# EAGLE board project (EAGLE 9.7.0)
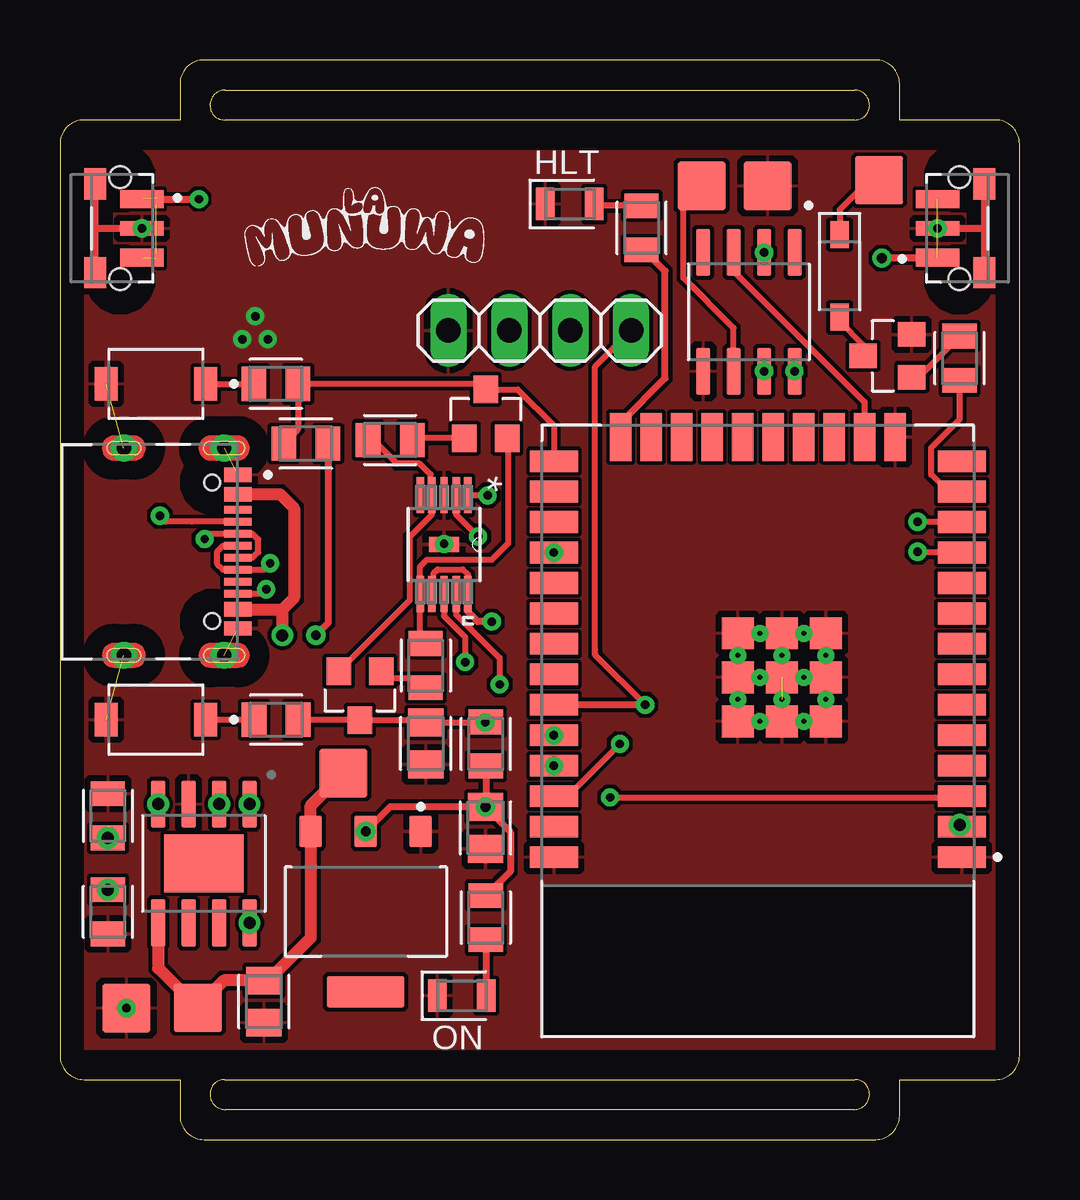
[diagram p0: board, top side]
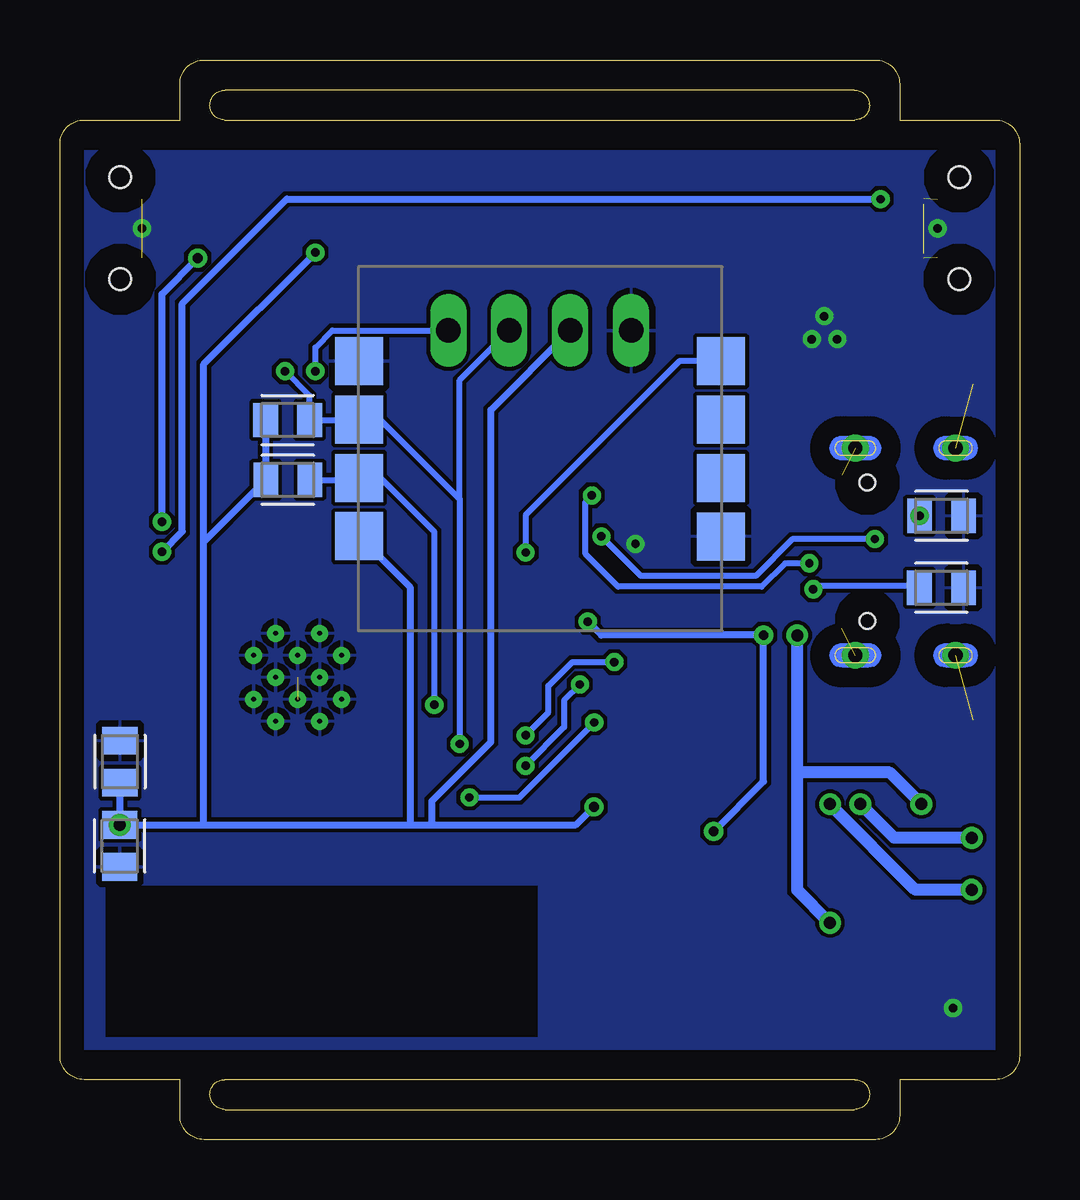
[diagram p1: board, bottom side, seen from below]

Size 40 x 45 mm. Coordinates in mm from the lower left corner, seen from the top.
Outline: 6.25,43.11 6.25,43.17 arc-85 6.88,43.75 33.12,43.75 arc-75 33.73,43.28 arc-105 33.13,42.5 6.87,42.5 arc-90 6.25,43.11
Outline: 5.99,28.82 6,28.85 6,28.87 6.01,28.9 6.01,28.93 6.02,28.95 6.04,28.97 6.05,28.99 6.07,29.02 6.08,29.03 6.1,29.05 6.12,29.07 6.14,29.08 6.17,29.09 6.19,29.1 6.22,29.11 6.24,29.12 6.27,29.12 6.29,29.12 7.39,29.12 7.42,29.12 7.45,29.12 7.47,29.11 7.5,29.1 7.52,29.09 7.54,29.08 7.57,29.07 7.59,29.05 7.61,29.03 7.62,29.02 7.64,28.99 7.65,28.97 7.67,28.95 7.68,28.93 7.69,28.9 7.69,28.87 7.69,28.85 7.7,28.82 7.69,28.8 7.69,28.77 7.69,28.75 7.68,28.72 7.67,28.7 7.65,28.67 7.64,28.65 7.62,28.63 7.61,28.61 7.59,28.59 7.57,28.58 7.54,28.56 7.52,28.55 7.5,28.54 7.47,28.53 7.45,28.53 7.42,28.52 7.39,28.52 6.29,28.52 6.27,28.52 6.24,28.53 6.22,28.53 6.19,28.54 6.17,28.55 6.14,28.56 6.12,28.58 6.1,28.59 6.08,28.61 6.07,28.63 6.05,28.65 6.04,28.67 6.02,28.7 6.01,28.72 6.01,28.75 6,28.77 6,28.8 5.99,28.82
Outline: 5.99,20.18 6,20.21 6,20.23 6.01,20.26 6.01,20.29 6.02,20.31 6.04,20.33 6.05,20.35 6.07,20.38 6.08,20.39 6.1,20.41 6.12,20.43 6.14,20.44 6.17,20.45 6.19,20.46 6.22,20.47 6.24,20.48 6.27,20.48 6.29,20.48 7.39,20.48 7.42,20.48 7.45,20.48 7.47,20.47 7.5,20.46 7.52,20.45 7.54,20.44 7.57,20.43 7.59,20.41 7.61,20.39 7.62,20.38 7.64,20.35 7.65,20.33 7.67,20.31 7.68,20.29 7.69,20.26 7.69,20.23 7.69,20.21 7.7,20.18 7.69,20.16 7.69,20.13 7.69,20.11 7.68,20.08 7.67,20.05 7.65,20.03 7.64,20.01 7.62,19.99 7.61,19.97 7.59,19.95 7.57,19.94 7.54,19.92 7.52,19.91 7.5,19.9 7.47,19.89 7.45,19.89 7.42,19.88 7.39,19.88 6.29,19.88 6.27,19.88 6.24,19.89 6.22,19.89 6.19,19.9 6.17,19.91 6.14,19.92 6.12,19.94 6.1,19.95 6.08,19.97 6.07,19.99 6.05,20.01 6.04,20.03 6.02,20.05 6.01,20.08 6.01,20.11 6,20.13 6,20.16 5.99,20.18
Outline: 1.96,20.18 1.97,20.21 1.97,20.23 1.98,20.26 1.98,20.29 1.99,20.31 2.01,20.33 2.02,20.35 2.04,20.38 2.05,20.39 2.07,20.41 2.09,20.43 2.11,20.44 2.14,20.45 2.16,20.46 2.19,20.47 2.21,20.48 2.24,20.48 2.27,20.48 3.07,20.48 3.09,20.48 3.12,20.48 3.14,20.47 3.17,20.46 3.19,20.45 3.21,20.44 3.24,20.43 3.26,20.41 3.28,20.39 3.3,20.38 3.31,20.35 3.32,20.33 3.34,20.31 3.35,20.29 3.36,20.26 3.36,20.23 3.36,20.21 3.36,20.18 3.36,20.16 3.36,20.13 3.36,20.11 3.35,20.08 3.34,20.05 3.32,20.03 3.31,20.01 3.3,19.99 3.28,19.97 3.26,19.95 3.24,19.94 3.21,19.92 3.19,19.91 3.17,19.9 3.14,19.89 3.12,19.89 3.09,19.88 3.07,19.88 2.27,19.88 2.24,19.88 2.21,19.89 2.19,19.89 2.16,19.9 2.14,19.91 2.11,19.92 2.09,19.94 2.07,19.95 2.05,19.97 2.04,19.99 2.02,20.01 2.01,20.03 1.99,20.05 1.98,20.08 1.98,20.11 1.97,20.13 1.97,20.16 1.96,20.18
Outline: 1.96,28.82 1.97,28.85 1.97,28.87 1.98,28.9 1.98,28.93 1.99,28.95 2.01,28.97 2.02,28.99 2.04,29.02 2.05,29.03 2.07,29.05 2.09,29.07 2.11,29.08 2.14,29.09 2.16,29.1 2.19,29.11 2.21,29.12 2.24,29.12 2.27,29.12 3.07,29.12 3.09,29.12 3.12,29.12 3.14,29.11 3.17,29.1 3.19,29.09 3.21,29.08 3.24,29.07 3.26,29.05 3.28,29.03 3.3,29.02 3.31,28.99 3.32,28.97 3.34,28.95 3.35,28.93 3.36,28.9 3.36,28.87 3.36,28.85 3.36,28.82 3.36,28.8 3.36,28.77 3.36,28.75 3.35,28.72 3.34,28.7 3.32,28.67 3.31,28.65 3.3,28.63 3.28,28.61 3.26,28.59 3.24,28.58 3.21,28.56 3.19,28.55 3.17,28.54 3.14,28.53 3.12,28.53 3.09,28.52 3.07,28.52 2.27,28.52 2.24,28.52 2.21,28.53 2.19,28.53 2.16,28.54 2.14,28.55 2.11,28.56 2.09,28.58 2.07,28.59 2.05,28.61 2.04,28.63 2.02,28.65 2.01,28.67 1.99,28.7 1.98,28.72 1.98,28.75 1.97,28.77 1.97,28.8 1.96,28.82
Outline: 6.87,2.5 33.13,2.5 arc-95 33.75,1.83 arc-85 33.12,1.25 6.88,1.25 arc-75 6.27,1.72 arc-15 6.25,1.89 arc-90 6.87,2.5
Outline: 0,41.5 0,3.5 arc90 1,2.5 5,2.5 5,1 arc90 6,0 34,0 arc90 35,1 35,2.5 39,2.5 arc90 40,3.5 40,41.5 arc90 39,42.5 35,42.5 35,44 arc90 34,45 6,45 arc90 5,44 5,42.5 1,42.5 arc90 0,41.5
Copper layers (1*16): Top / Bottom
Stack-up Default Layer Stack: Top SilkScreen Epoxy Ink / Top SolderMask SR:Green 0.0254mm Dk 4.3 / Top Surface Finish Lead-Free 0.02mm / Top CuFoil:007 0.035mm / Dielectric-1 User Defined 1.5mm / Bottom CuFoil:007 0.035mm / Bottom Surface Finish Lead-Free 0.02mm / Bottom SolderMask SR:Green 0.0254mm Dk 4.3 / Bottom SilkScreen Epoxy Ink
Design rules: minimum copper width 6mil, minimum drill size 0.35mm, copper clearance wire_polygon to wire_polygon 6mil, copper clearance wire_polygon to pad_smd 6mil, copper clearance wire_polygon to via 6mil, copper clearance pad_smd to pad_smd 6mil, copper clearance pad_smd to via 6mil, copper clearance via to via 6mil, copper clearance smd to pad (same net) 6mil, copper clearance smd to via (same net) 6mil, copper clearance smd to smd (same net) 6mil, dimension clearance 40mil, via restrict clearance 0mil, restrict clearance 0mil, drill distance 6mil, keepout clearance 0mil

## Footprints (pad centres in the part's own frame; a part is rotated, then mirrored left to right if it is on the bottom)
SOLDER_PAD_2MM = smd 2 x 2: SP 0,0
CAPC2012X110 = smd 1.165 x 1.465: 1 -0.875,0; 2 0.875,0
LEDC2012X110N_FLAT-G = smd 0.762 x 1.362: A 1.025,0; C -1.025,0
LEDC2012X110N_FLAT-R = smd 0.762 x 1.362: A 1.025,0; C -1.025,0
SOD3715X135 = smd 1.127 x 0.784: 1 -1.722,0; 2 1.722,0
TYPE-C(16PIN) = smd 0.6 x 1.15: A1_B12 -3.2,3.67; A4_B9 -2.4,3.67; B1_A12 3.2,3.67; B4_A9 2.4,3.67 | smd 0.3 x 1.15: A5 -1.25,3.67; A6 -0.25,3.67; A7 0.25,3.67; A8 1.25,3.67; B5 1.75,3.67; B6 0.75,3.67; B7 -0.75,3.67; B8 -1.75,3.67 | drill 0.6 pad 1: SH1 -4.32,-1.075; SH2 4.32,-1.075; SH3 -4.32,3.105; SH4 4.32,3.105 | hole 0.65: -2.89,2.605; 2.89,2.605
1X04 = drill 1.016 long: 1 -3.81,0; 2 -1.27,0; 3 1.27,0; 4 3.81,0
SOT-23 = smd 1.016 x 1.143: 1 -0.889,-1.016; 2 0.889,-1.016; 3 0,1.016
RESC2012X65 = smd 1.031 x 1.42: 1 -0.919,0; 2 0.919,0
PUSH-LATERAL = smd 0.75 x 1.8: 1 -1.225,0.9; 3 1.225,0.9 | smd 0.6 x 1.8: 2 0,0.9 | smd 1.3 x 0.9: S1 -1.85,-1.05; S2 1.85,-1.05 | hole 0.9: -2.125,0; 2.125,0
PUSH-4X3 = smd 0.95 x 1.4: 1 -2.075,0; 2 2.075,0
SOP127P600X175-9N = smd 1.97 x 0.6: 1 -2.475,1.905; 2 -2.475,0.635; 3 -2.475,-0.635; 4 -2.475,-1.905; 5 2.475,-1.905; 6 2.475,-0.635; 7 2.475,0.635; 8 2.475,1.905 | smd 2.413 x 3.302: 9 0,0
SOP50P490X110-10N = smd 0.635 x 1.27: 0 0,0 | smd 1.499 x 0.305: 1 -2.057,0.991; 2 -2.057,0.508; 3 -2.057,0; 4 -2.057,-0.508; 5 -2.057,-0.991; 6 2.057,-0.991; 7 2.057,-0.508; 8 2.057,0; 9 2.057,0.508; 10 2.057,0.991
AMS1117_3.3 = smd 0.93 x 1.31: 1 -2.29,-3.345; 2 0,-3.345; 3 2.29,-3.345 | smd 3.24 x 1.31: 4 0,3.345
MODULE_ESP32-WROOM-32 = smd 2 x 0.9: 1 -8.5,5.26; 2 -8.5,3.99; 3 -8.5,2.72; 4 -8.5,1.45; 5 -8.5,0.18; 6 -8.5,-1.09; 7 -8.5,-2.36; 8 -8.5,-3.63; 9 -8.5,-4.9; 10 -8.5,-6.17; 11 -8.5,-7.44; 12 -8.5,-8.71; 13 -8.5,-9.98; 14 -8.5,-11.25; 25 8.5,-11.25; 26 8.5,-9.98; 27 8.5,-8.71; 28 8.5,-7.44; 29 8.5,-6.17; 30 8.5,-4.9; 31 8.5,-3.63; 32 8.5,-2.36; 33 8.5,-1.09; 34 8.5,0.18; 35 8.5,1.45; 36 8.5,2.72; 37 8.5,3.99; 38 8.5,5.26 | smd 0.9 x 2: 15 -5.715,-12.25; 16 -4.445,-12.25; 17 -3.175,-12.25; 18 -1.905,-12.25; 19 -0.635,-12.25; 20 0.635,-12.25; 21 1.905,-12.25; 22 3.175,-12.25; 23 4.445,-12.25; 24 5.715,-12.25 | smd 1.33 x 1.33: 39_1 -2.835,-0.405; 39_2 -1,-0.405; 39_3 0.835,-0.405; 39_4 -2.835,-2.24; 39_5 -1,-2.24; 39_6 0.835,-2.24; 39_7 -2.835,-4.075; 39_8 -1,-4.075; 39_9 0.835,-4.075 | drill 0.2 pad 0.3: 39_10 -1.917,-0.405; 39_11 -0.083,-0.405; 39_12 -2.835,-1.323; 39_13 -1,-1.323; 39_14 0.835,-1.323; 39_15 -1.917,-2.24; 39_16 -0.083,-2.24; 39_17 -2.835,-3.158; 39_18 -1,-3.158; 39_19 0.835,-3.158; 39_20 -1.917,-4.075; 39_21 -0.083,-4.075
SOIC127P600X175-8N = smd 1.97 x 0.59: 1 -2.475,1.905; 2 -2.475,0.635; 3 -2.475,-0.635; 4 -2.475,-1.905; 5 2.475,-1.905; 6 2.475,-0.635; 7 2.475,0.635; 8 2.475,1.905
MAX30100 = smd 2 x 2: GND1 7.544,-3.648; GND2 -7.544,3.654; INT -7.544,-3.642; IR0 -7.544,-1.21; RD -7.544,1.222; SCL 7.544,-1.216; SDA 7.544,1.216; VIN 7.544,3.648

## Placement (x,y rotation side)
BAT+  SOLDER_PAD_2MM  [SOLDER_PAD_2MM]  5.75,5.49 0 top
BAT-  SOLDER_PAD_2MM  [SOLDER_PAD_2MM]  2.77,5.48 0 top
C1  10u  [CAPC2012X110]  8.5,5.75 270 top
C2  10u  [CAPC2012X110]  37.5,15.75 90 bottom
C3  22u  [CAPC2012X110]  17.74,12.99 270 top
C4  100n  [CAPC2012X110]  37.51,12.24 270 bottom
C5  100n  [CAPC2012X110]  15.25,16.51 270 top
CBAT+  SOLDER_PAD_2MM  [SOLDER_PAD_2MM]  26.75,39.75 0 top
CBAT-  SOLDER_PAD_2MM  [SOLDER_PAD_2MM]  29.5,39.75 0 top
D1  CHIP-FLAT-G_0805  [LEDC2012X110N_FLAT-G]  16.75,6 0 top
D2  CHIP-FLAT-R_0805  [LEDC2012X110N_FLAT-R]  21.25,39 0 top
D3  DIODE_1N4148W-7-F_SOD123G  [SOD3715X135]  32.5,36 270 top
J1  TYPE-C(16PIN)"  [TYPE-C(16PIN)]  3.74,24.5 270 top
JP1  PINHD-1X4  [1X04]  20,33.72 0 top
MTR+  SOLDER_PAD_2MM  [SOLDER_PAD_2MM]  34.14,39.99 0 top
MTR-  SOLDER_PAD_2MM  [SOLDER_PAD_2MM]  11.81,15.27 0 top
Q1  SMD-TRANSISTORS-NPN-25V-500MW(SOT-23)  [SOT-23]  12.51,18.5 180 top
Q2  SMD-TRANSISTORS-NPN-25V-500MW(SOT-23)  [SOT-23]  17.75,30.25 0 top
Q3  SMD-TRANSISTORS-NPN-25V-500MW(SOT-23)  [SOT-23]  34.49,32.67 90 top
R1  5.1K  [RESC2012X65]  3.25,23 0 bottom
R2  5.1K  [RESC2012X65]  3.25,26 0 bottom
R3  10K  [RESC2012X65]  2,9.49 270 top
R4  10K  [RESC2012X65]  15.25,19.76 90 top
R5  10K  [RESC2012X65]  13.76,29.16 180 top
R6  470  [RESC2012X65]  9,31.5 0 top
R7  10K  [RESC2012X65]  10.25,29.01 0 top
R8  470  [RESC2012X65]  9.01,17.5 0 top
R9  10K  [RESC2012X65]  17.75,16.49 270 top
R10  330  [RESC2012X65]  37.5,32.57 270 top
R11  330  [RESC2012X65]  17.75,9.25 90 top
R12  330  [RESC2012X65]  24.24,38 270 top
R13  4.7K  [RESC2012X65]  30.5,27.5 0 bottom
R14  4.7K  [RESC2012X65]  30.51,29.99 180 bottom
R17  5.1K  [RESC2012X65]  1.99,13.5 90 top
S1  PUSH-LATERAL  [PUSH-LATERAL]  2.52,37.98 270 top
S2  PUSH-LATERAL  [PUSH-LATERAL]  37.48,37.98 90 top
S4  PUSH-4X3  [PUSH-4X3]  4,31.5 180 top
S5  PUSH-4X3  [PUSH-4X3]  4,17.5 180 top
U1  TP4056  [SOP127P600X175-9N]  6,11.51 270 top
U2  CH340XSOP50P490X110-10N  [SOP50P490X110-10N]  16.01,24.8 270 top
U3  AMS1117_3.3  [AMS1117_3.3]  12.75,9.5 180 top
U4  ESP32  [MODULE_ESP32-WROOM-32]  29.09,17.03 180 top
U5  DS3231MZ+  [SOIC127P600X175-8N]  28.72,34.5 270 top
U6  MAX30100MAX30100  [MAX30100]  19.99,28.8 180 bottom

## Library data of the parts
BAT+ BAT- CBAT+ CBAT- MTR+ MTR- = SOLDER PAD
C1-C5 = Tutorial - Fusion 360; CATEGORY: Capacitor
D1 = LED; CATEGORY: LED; COLOR: Green; DESCRIPTION: Green LED Indication 0805 (2012 Metric); PACKAGE_SIZE: 0805; PACKAGE_TYPE: Surface Mount; SUBCATEGORY: Chip LED; TYPE: Square with Flat Top
D2 = LED; CATEGORY: LED; COLOR: Red; DESCRIPTION: Red LED Indication 0805 (2012 Metric); PACKAGE_SIZE: 0805; PACKAGE_TYPE: Surface Mount; SUBCATEGORY: Chip LED; TYPE: Square with Flat Top
D3 = Diode; CATEGORY: Diode; DATASHEET: https://www.diodes.com/datasheet/download/1N4148W.pdf; DESCRIPTION: Diode 100 V 300mA Surface Mount SOD-123; FORWARD_CURRENT: 150mA; FORWARD_VOLTAGE: 1.25V; MANUFACTURER: Diodes Incorporated; MPN: 1N4148W-7-F; OPERATING_TEMPERATURE: -55°C ~ 150°C; PACKAGE_SIZE: SOD-123; PACKAGE_TYPE: Surface Mount; PART_STATUS: Active; REVERSE_VOLTAGE: 100V; ROHS: Compliant; SERIES: 1N4148; SUBCATEGORY: Rectifiers; TYPE: Small Signal Switching Diodes; ZENER_VOLTAGE: NA
J1 = TYPE-C_16PIN_2MD__073_; AVAILABILITY: Not in stock; CHECK_PRICES: https://www.snapeda.com/parts/TYPE-C%2016PIN%202MD%20(073)/Shouhan/view-part/?ref=eda; DESCRIPTION: DC-5V 5A Type C USB; MF: Shouhan; MP: TYPE-C(16PIN); PACKAGE: Package; PRICE: None; SNAPEDA_LINK: https://www.snapeda.com/parts/TYPE-C%2016PIN%202MD%20(073)/Shouhan/view-part/?ref=snap
JP1 = Connector; CATEGORY: Connectors; DESCRIPTION: Header-Straight-4 Position; PACKAGE_TYPE: Through Hole; PITCH: 0.100" (2.54mm); SUBCATEGORY: Headers; TYPE: Male Pins
Q1-Q3 = S8050; AVAILABILITY: In Stock; CHECK_PRICES: https://www.snapeda.com/parts/S8050/MDD/view-part/?ref=eda; DESCRIPTION: Bipolar (BJT) Transistor NPN 25 V 500 mA 150MHz 300 mW Surface Mount SOT-23; MF: MDD; MP: S8050; PACKAGE: None; PRICE: None; SNAPEDA_LINK: https://www.snapeda.com/parts/S8050/MDD/view-part/?ref=snap
R1-R14 R17 = Resistor; CATEGORY: Resistors; DESCRIPTION: Chip Resistor 2.00 X 1.25 X 0.65 mm body 0805(2012-METRIC) Package; PACKAGE_SIZE: 0805; PACKAGE_TYPE: Surface Mount
S1 S2 = PUSH BUTTONS; AVAILABILITY: In Stock; CHECK_PRICES: https://www.snapeda.com/parts/SKRTLAE010/ALPS/view-part/?ref=eda; DESCRIPTION: Switch Tactile N.O. SPST Round Button J-Bend 0.05A 12VDC 1.6N SMD Embossed Tape; MF: ALPS; MP: SKRTLAE010; PACKAGE: None; PRICE: None; PURCHASE-URL: https://www.snapeda.com/api/url_track_click_mouser/?unipart_id=696622&manufacturer=ALPS&part_name=SKRTLAE010&search_term=alps skrp tactile switch; SNAPEDA_LINK: https://www.snapeda.com/parts/SKRTLAE010/ALPS/view-part/?ref=snap
S4 S5 = PUSH BUTTONS; AVAILABILITY: In Stock; CHECK_PRICES: https://www.snapeda.com/parts/TL1015AF160QG/E-Switch/view-part/?ref=eda; DESCRIPTION: Tactile Switch SPST-NO Top Actuated Surface Mount; MF: E-Switch; MP: TL1015AF160QG; PACKAGE: None; PRICE: None; SNAPEDA_LINK: https://www.snapeda.com/parts/TL1015AF160QG/E-Switch/view-part/?ref=snap
U1 = TP4056; AVAILABILITY: Not in stock; CHECK_PRICES: https://www.snapeda.com/parts/TP4056/NanJing+Top+Power+ASIC+Corp./view-part/?ref=eda; DESCRIPTION: Complete single cell Li-Ion battery with a constant current / constant voltage linear charger; MF: NanJing Top Power ASIC Corp.; MP: TP4056; PACKAGE: Package; PRICE: None; SNAPEDA_LINK: https://www.snapeda.com/parts/TP4056/NanJing+Top+Power+ASIC+Corp./view-part/?ref=snap
U2 = CH340
U3 = LDO; AVAILABILITY: In Stock; CHECK_PRICES: https://www.snapeda.com/parts/AMS1117-3.3/UMW/view-part/?ref=eda; DESCRIPTION: Linear Voltage Regulator IC Positive Fixed 1 Output 1A SOT-223-3L; MF: UMW; MP: AMS1117-3.3; PACKAGE: SOT-223-3L UMW; PRICE: None; SNAPEDA_LINK: https://www.snapeda.com/parts/AMS1117-3.3/UMW/view-part/?ref=snap
U4 = MICRO; AVAILABILITY: In Stock; CHECK_PRICES: https://www.snapeda.com/parts/ESP32-WROOM-32/Espressif+Systems/view-part/?ref=eda; DESCRIPTION: Bluetooth, WiFi 802.11b/g/n, Bluetooth v4.2 +EDR, Class 1, 2 and 3 Transceiver Module 2.4GHz ~ 2.5GHz Antenna Not Included, U.FL Surface Mount; MF: Espressif Systems; MP: ESP32-WROOM-32; PACKAGE: None; PRICE: None; SNAPEDA_LINK: https://www.snapeda.com/parts/ESP32-WROOM-32/Espressif+Systems/view-part/?ref=snap
U5 = DS3231MZ; AVAILABILITY: In Stock; CHECK_PRICES: https://www.snapeda.com/parts/DS3231MZ+/Analog+Devices/view-part/?ref=eda; DESCRIPTION: ±5ppm, I2C Real-Time Clock; MF: Analog Devices; MP: DS3231MZ+; PACKAGE: SOIC-8 Maxim; PRICE: None; SNAPEDA_LINK: https://www.snapeda.com/parts/DS3231MZ+/Analog+Devices/view-part/?ref=snap
U6 = MAX30100

## Nets
3.3V: C2.1 C3.1 C4.1 JP1.2 R7.2 R9.2 R11.2 R13.1 R14.2 U2.7 U2.10 U3.2 U4.2 U5.2 U6.VIN
BAT+: BAT+.SP C1.1 MTR-.SP U1.5 U3.3
DN: J1.A7 J1.B7 U2.2
DP: J1.A6 J1.B6 U2.1
EN: C5.1 Q1.3 R8.2 R9.1 U4.3
GND: BAT-.SP C1.2 C2.2 C3.2 C4.2 C5.2 CBAT-.SP D1.C D2.C J1.A1_B12 J1.B1_A12 J1.SH1 J1.SH2 J1.SH3 J1.SH4 JP1.1 Q3.2 R1.2 R2.2 R3.2 R17.2 S1.2 S1.S1 S1.S2 S2.2 S2.S1 S2.S2 S4.2 S5.2 U1.3 U2.0 U2.3 U3.1 U4.1 U4.15 U4.38 U4.39_1 U4.39_2 U4.39_3 U4.39_4 U4.39_5 U4.39_6 U4.39_7 U4.39_8 U4.39_9 U4.39_10 U4.39_11 U4.39_12 U4.39_13 U4.39_14 U4.39_15 U4.39_16 U4.39_17 U4.39_18 U4.39_19 U4.39_20 U4.39_21 U5.5 U6.GND1 U6.GND2
INT: U4.28 U6.INT
IO0: Q2.3 R6.2 R7.1 U4.25
IO2: R12.2 U4.24
N$1: J1.A5 R2.1
N$2: J1.B5 R1.1
N$3: Q1.1 R4.1
N$4: R3.1 U1.1
N$5: Q2.1 R5.1
N$6: CBAT+.SP U5.6
N$7: D1.A R11.1
N$8: R6.1 S4.1
N$9: D3.2 Q3.3
N$10: R8.1 S5.1
N$11: D2.A R12.1
N$13: Q3.1 R10.1
N$15: R17.1 U1.2
N$16: D3.1 MTR+.SP
N$21: Q1.2 R5.2 U2.4
N$22: Q2.2 R4.2 U2.6
PUSH1: S1.1 S1.3 U4.11
PUSH2: S2.1 S2.3 U4.12
RX: U2.8 U4.34
SCL: JP1.3 R14.1 U4.36 U5.8 U6.SCL
SDA: JP1.4 R13.2 U4.33 U5.7 U6.SDA
SQW: U4.16 U5.3
TRAN: R10.2 U4.13
TX: U2.9 U4.35
VBUS: J1.A4_B9 J1.B4_A9 U1.4 U1.8

## Tracks (layer width: path | path; a pad name or v marks a point on that pad's centre or on a via)
3.3V  (via drill 0.35, 0.4, 0.5 pad 0.8)
  Top 0.25: U4.2 C4.1 | U2.7 15.58,22.82 15.58,23.61 15.74,23.77 16.79,23.77 17,23.55 U2.10
  Top 0.3: R9.2 C3.1 | 11.5,29.01 R7.2 11.17,21.53 v10.67,21.03 | C3.1 13.77,13.87 U3.2 | R11.2 18.77,11.19 18.77,12.82 17.74,13.86 C3.1 | v18,21.59 17.42,21.59 17,22.01 U2.10
  Bottom 0.3: U3.2 10.67,14.92 v10.67,21.03 17.44,21.03 v18,21.59 | C2.1 C4.1 34.01,13.12 | 34.01,13.12 25.39,13.12 | 25.39,13.12 24.5,13.12 | 24.5,13.12 18.49,13.12 C3.1 | R14.2 R13.1 34.01,24.91 | 24.5,13.12 24.5,14.11 22.04,16.57 22.04,30.41 JP1.2 | 25.39,13.12 25.39,23.01 U6.VIN | 34.01,13.12 34.01,24.91 | 34.01,24.91 34.01,32.32 U5.2
  other vias: 12.75,12.84 17.74,13.87 37.51,13.12 29.35,36.98
BAT+
  Top 0.5: U1.5 4.09,7.15 BAT+.SP 5.75,5.55 6.83,6.62 C1.1 8.67,6.62 10.46,8.41 U3.3 10.46,13.92 MTR-.SP
DN  (via drill 0.35)
  Top 0.25: J1.A7 8.03,24.25 8.26,24.49 8.26,25.02 8.02,25.26 J1.B7 6.25,25.25 v6.03,25.03 | v17.43,25.14 v17.42,25.14 16.52,26.05 U2.2
  Bottom 0.25: v6.03,25.03 v6.04,25.02 9.47,25.02 11,23.5 15.79,23.5 v17.43,25.14 | v17.43,25.14
DP  (via drill 0.35)
  Top 0.25: v8.76,24.02 8.49,23.75 J1.B6 6.79,23.75 6.56,23.99 6.56,24.52 6.79,24.75 J1.A6 | v17.83,26.85 U2.1
  Bottom 0.25: v8.76,24.02 9.78,24.02 10.76,23.05 16.73,23.05 18.09,24.4 18.09,26.59 v17.83,26.85
EN  (via drill 0.35)
  Top 0.25: R9.1 v17.73,17.38 C5.1 15.15,17.48 Q1.3 9.95,17.48 R8.2 | U4.3 37.53,14.25 37.52,14.26 v22.93,14.26
  Bottom 0.25: v17.73,17.38 20.86,14.25 v22.92,14.25 v22.93,14.26
GND  (via drill 0.35)  (5 unrouted)
  Top 0.3: S1.2 3.32,37.98 3.3,38 1.47,38 | S1.S2 1.47,38 | 1.47,38 S1.S1 | S2.S2 38.53,37.96 | 38.53,37.96 S2.S1 | 38.53,37.96 36.6,37.96 S2.2
  other vias: 2.77,5.48 36.58,37.98 3.42,37.98 8.14,34.32 7.6,33.36 8.66,33.36 16.01,24.83
  pour Top: 0,3.75 0,41.25 40,41.25 40,3.75
  pour Bottom: 0,41.25 0,3.75 40,3.75 40,41.25
INT  (via drill 0.35)
  Bottom 0.25: U4.28 20.59,26.03 14.18,32.44 U6.INT
  other vias: 20.59,24.47
IO0
  Top 0.25: R7.1 9.92,29.6 R6.2 9.94,31.52 17.5,31.52 Q2.3 19.08,31.27 20.59,29.75 U4.25
IO2
  Top 0.3: R12.2 24.34,37.08 25.22,36.2 25.22,31.73 23.38,29.89 U4.24
N$1  (via drill 0.35)
  Top 0.2: J1.A5
  Top 0.25: J1.A5 5.5,25.75 | 5.5,25.75 4.42,25.75 R2.1 | 5.5,25.75
  other vias: 4.17,26
N$2  (via drill 0.35)
  Top 0.25: J1.B5 8.41,22.75 v8.6,22.94
  Bottom 0.25: v8.6,22.94 8.46,23.08 4.25,23.08 R1.1
N$3
  Top 0.25: 13.66,19.25 Q1.1 13.68,19.23 14.86,19.23 R4.1
N$4  (via drill 0.5 pad 0.8)
  Bottom 0.5: U1.1 4.33,10.41 R3.1
  other vias: 7.9,13.98 2,10.41
N$5
  Top 0.25: Q2.1 14.76,29.23 R5.1
N$6
  Top 0.25: CBAT+.SP 25.99,38.99 25.99,35.92 28.08,33.83 U5.6
N$7
  Top 0.2: D1.A
  Top 0.3: R11.1 17.75,6.03 D1.A
N$8
  Top 0.25: S4.1 R6.1
N$9
  Top 0.25: Q3.3 33.47,33.12 32.5,34.09 D3.2
N$10
  Top 0.25: R8.1 S5.1
N$11
  Top 0.25: R12.1 22.35,38.92 D2.A
N$13
  Top 0.25: R10.1 35.79,31.78 Q3.1
N$15  (via drill 0.5 pad 0.8)
  Bottom 0.5: U1.2 5.23,12.58 R17.1
  other vias: 6.63,13.98 1.99,12.58
N$16
  Top 0.25: D3.1 32.5,38.75 33.74,39.99 MTR+.SP
N$21
  Top 0.25: Q1.2 14.59,22.49 14.59,25.13 15.5,26.05 U2.4 15.45,26.91 15.45,27.72 15,28.17 14.05,28.17 13.07,29.16 R5.2
N$22
  Top 0.25: R4.2 15.02,20.68 U2.6 15.02,23.89 15.3,24.17 18.01,24.17 18.69,24.86 18.69,29.18 Q2.2
PUSH1  (via drill 0.35)  (3 unrouted)
  Top 0.25: U4.11 35.78,24.47 v35.75,24.5
  Top 0.3: 4,39.25 4,39 | 4,36.93 4,36.75 | S1.1 5.77,39.21 5.77,39.2 v5.79,39.2
  Bottom 0.3: v35.75,24.5 34.9,25.35 34.9,34.85 30.55,39.2 v5.79,39.2
PUSH2  (via drill 0.35, 0.4)  (1 unrouted)
  Top 0.25: U4.12 35.76,25.74 v35.75,25.75
  Top 0.3: S2.1 36.56,36.74 v34.26,36.74
  Bottom 0.3: v35.75,25.75 35.75,35.25 v34.26,36.74
RX  (via drill 0.35)
  Top 0.25: v16.89,19.9 16.89,20.95 16.01,21.83 U2.8
  Bottom 0.25: U4.34 19.64,17.8 19.64,18.91 18.64,19.91 v16.9,19.91 v16.89,19.9
  other vias: 20.59,16.85
SCL  (via drill 0.35)
  Top 0.25: 21.17,14.31 20.66,14.31 U4.36 21.16,14.31 v23.34,16.49
  Bottom 0.25: R14.1 29.5,29.99 | R14.1 27.55,29.99 U6.SCL 26.65,30.02 23.34,26.7 | 23.34,26.7 v23.34,16.49 | 23.34,26.7 23.34,31.65 JP1.3 | R14.1 29.59,30.99 U5.8
  other vias: 30.62,32.02
SDA  (via drill 0.35)
  Top 0.25: JP1.4 22.31,32.21 22.31,20.42 22.31,20.26 22.31,20.21 v24.4,18.12
  Top 0.3: U4.33 v24.4,18.12
  Bottom 0.25: R13.2 27.62,27.5 U6.SDA 26.64,27.58 24.4,25.34 v24.4,18.12 | JP1.4 28.65,33.72 29.35,33.02 U5.7
  other vias: 29.35,32.02
SQW
  Top 0.25: U5.3 28.08,36.19 33.54,30.74 U4.16
TRAN
  Top 0.25: R10.2 37.5,30.03 36.31,28.84 36.31,27.71 37.02,27.01 U4.13
TX  (via drill 0.35)
  Top 0.25: U2.9 16.52,21.89 18.33,20.08 v18.33,18.97
  Bottom 0.25: U4.35 18.98,17.19 18.98,18.32 v18.33,18.97
  other vias: 20.59,15.58
VBUS  (via drill 0.5 pad 0.8)
  Top 0.5: J1.A4_B9 9.17,26.9 9.75,26.32 9.75,22.58 9.27,22.1 | J1.B4_A9 9.27,22.1 | 9.27,22.1 v9.27,21.02
  Bottom 0.5: U1.8 9.27,10.4 9.27,15.3 | 9.27,15.3 v9.27,21.02 | U1.4 5.41,15.3 9.27,15.3
  other vias: 7.9,9.03 4.09,13.98

## Text on the board
NamesTop: HLT | ON
200bmp: C:/Users/anava/OneDrive/Documents/LA.bmp